# Altium PCB 手工板.PcbDoc
Units mil, origin at the board's own origin, x right, y up, seen from the top; angles counter-clockwise.
Board outline 6000 x 4000 mil, 2 copper layers (Top Layer, Bottom Layer); 49 components, 25 nets, 90 pads, 0 vias.
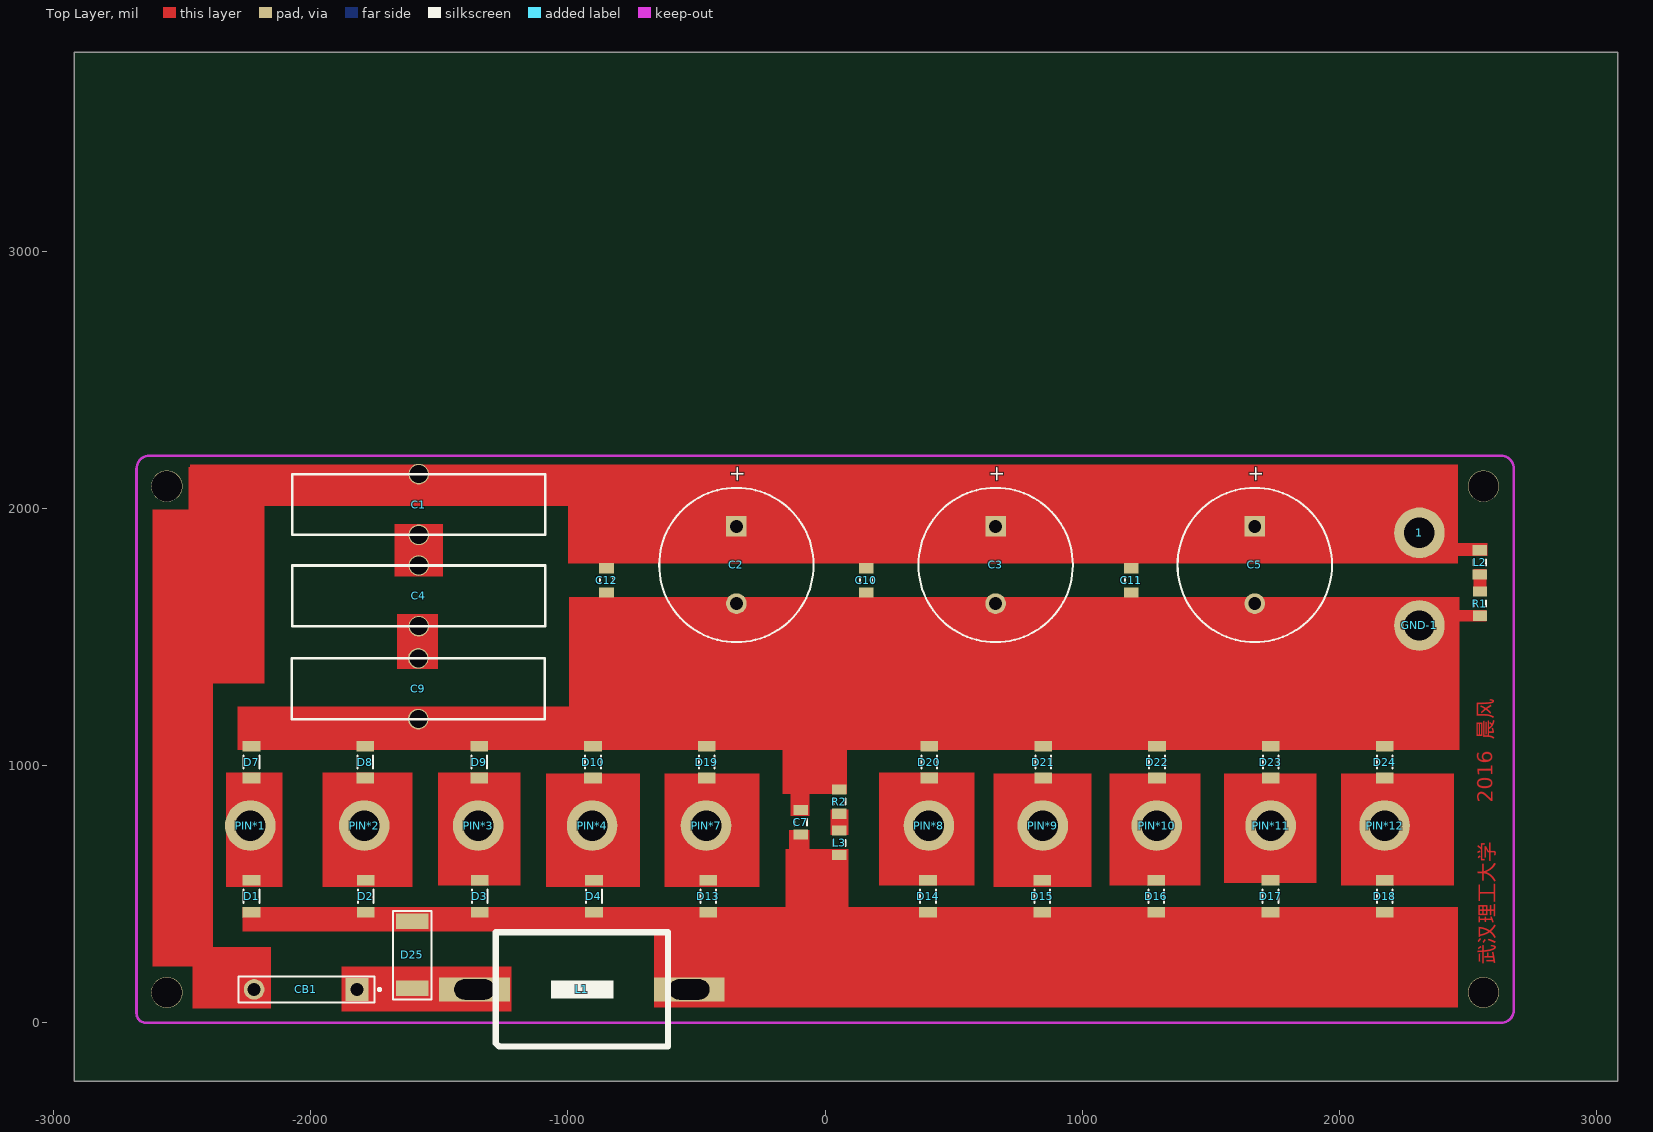
[diagram p0: Top Layer view]
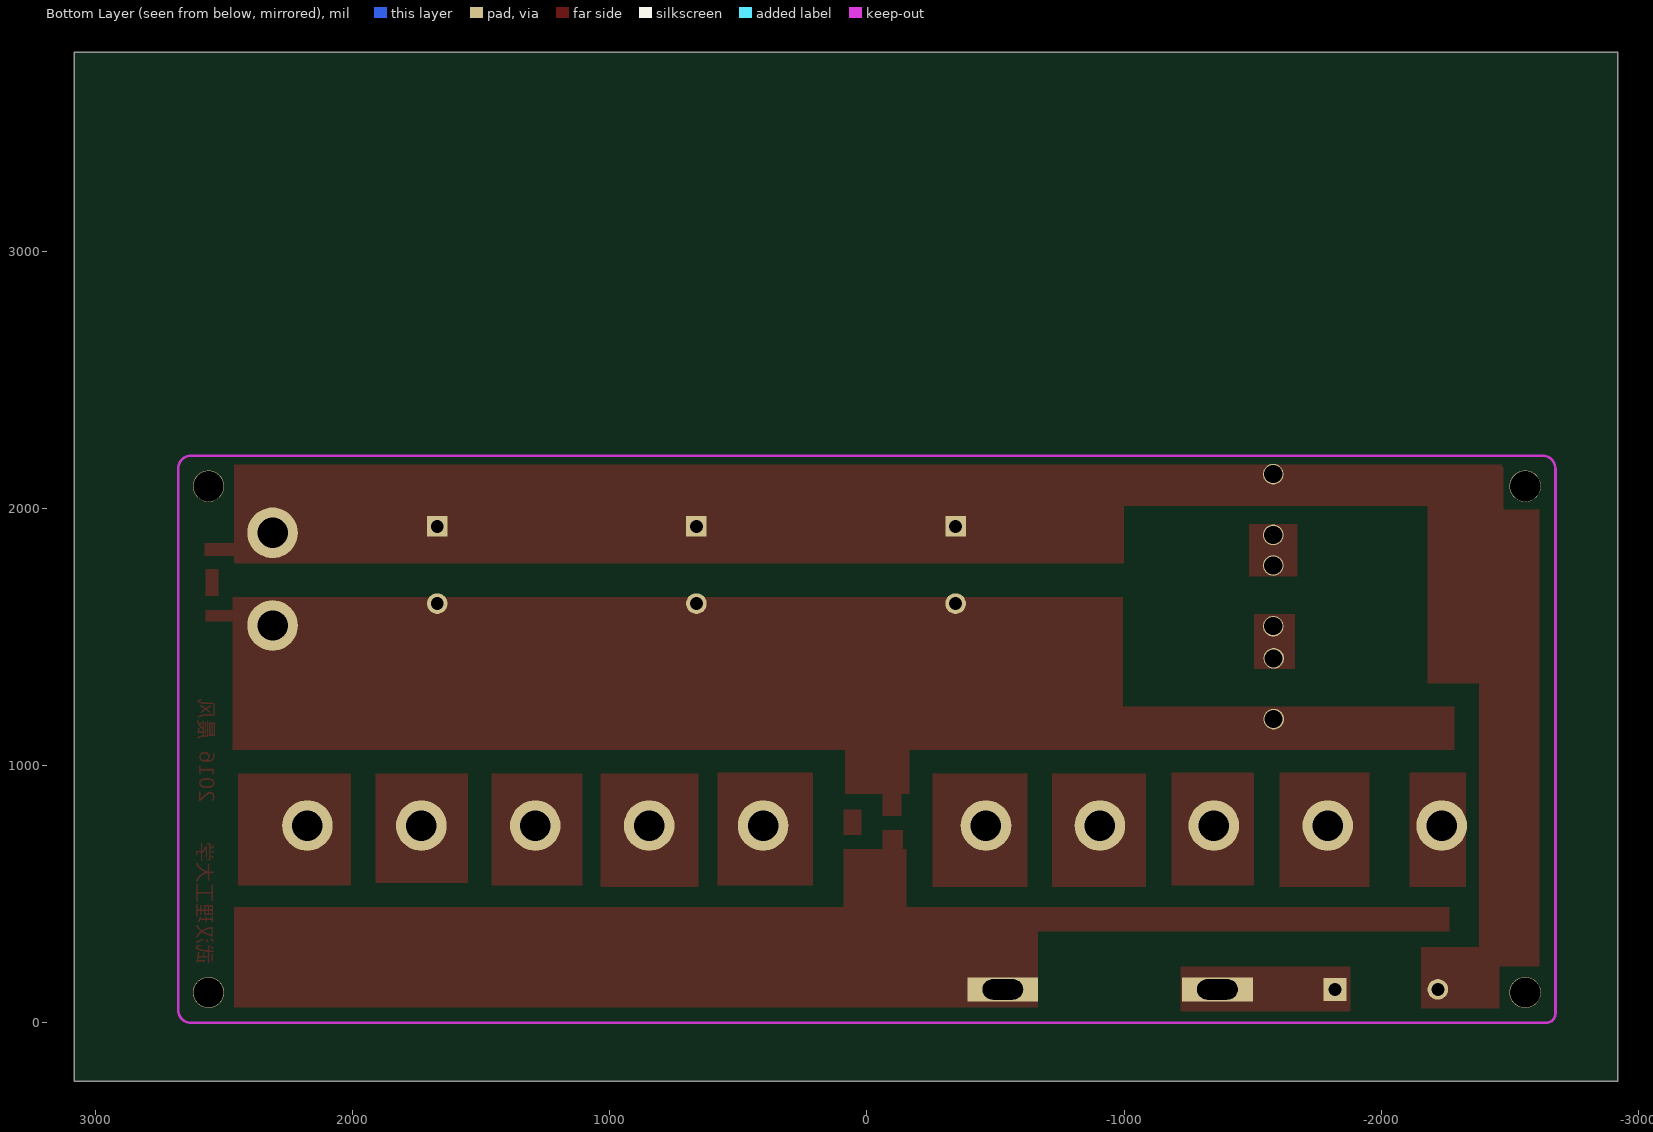
[diagram p1: Bottom Layer view, seen from below]

## Layer stack, top to bottom
Top Layer: signal copper 1.4
Dielectric: dielectric 12.6, FR-4, Dk 4.8
Bottom Layer: signal copper 1.4

## Board outline
-2919.06,-226.89 3080.94,-226.89 3080.94,3773.11 -2919.06,3773.11

## Design rules (kind name [scope] priority, off if disabled: settings)
Clearance [All] p1: gap=25
PolygonConnect [All] p1: connectstyle=Relief reliefconductorwidth=10 reliefentries=4 polygonreliefangle="90 Angle" airgapwidth=10
RoutingVias [All] p1: holewidth=28 width=50 viastyle="Through Hole" minholewidth=28 minwidth=50 maxholewidth=28 maxwidth=50
SolderMaskExpansion [All] p1: expansion=4
Width [All] p1: maxlimit=10 minlimit=10 preferedwidth=10
28 further rules are at their usual default settings.

## Components (designator, comment, footprint, x,y, rotation, side; value= is the part's Value field where it differs from the comment)
1 "PIN" PIN#1 2310,1905 r90 top
C1 "Cap Pol1" 法拉电容 -1580,2015 r270 top
C2 "Cap Pol1" RB7.6-15 -345,1780 r90 top
C3 "Cap Pol1" RB7.6-15 662.5,1780 r90 top
C4 "Cap Pol1" 法拉电容 -1580,1660 r270 top
C5 "Cap Pol1" RB7.6-15 1670,1780 r90 top
C7 "Cap Pol1" C2012 -95,780 r90 top
C9 "Cap Pol1" 法拉电容 -1581.89,1299.06 r270 top
C10 "Cap" C2012 160,1720 r90 top
C11 "Cap" C2012 1190,1720 r90 top
C12 "Cap" C2012 -850,1720 r90 top
CB1 "Circuit Breaker" SPST-2 -1920,130 r180 top
D1 "S4" 1206(2) -2230,491.89 r270 top
D2 "S4" 1206(2) -1786.25,491.89 r270 top
D3 "S4" 1206(2) -1342.5,491.89 r270 top
D4 "S4" 1206(2) -898.75,491.89 r270 top
D7 "S4" 1206(2) -2230,1013.78 r270 top
D8 "S4" 1206(2) -1787.5,1013.78 r270 top
D9 "S4" 1206(2) -1345,1013.78 r270 top
D10 "S4" 1206(2) -902.5,1013.78 r270 top
D13 "S4" 1206(2) -455,491.89 r270 top
D14 "S4" 1206(2) 400,491.89 r270 top
D15 "S4" 1206(2) 843.75,491.89 r270 top
D16 "S4" 1206(2) 1287.5,491.89 r270 top
D17 "S4" 1206(2) 1731.25,491.89 r270 top
D18 "S4" 1206(2) 2175,491.89 r270 top
D19 "S4" 1206(2) -460,1013.78 r270 top
D20 "S4" 1206(2) 405,1013.78 r270 top
D21 "S4" 1206(2) 847.5,1013.78 r270 top
D22 "S4" 1206(2) 1290,1013.78 r270 top
D23 "S4" 1206(2) 1732.5,1013.78 r270 top
D24 "S4" 1206(2) 2175,1013.78 r270 top
D25 "Diode 1N4001" SK54 -1605,265 r90 top
GND-1 "PIN" PIN#1 2310,1545 r0 top
L1 "33uH" SMD-EC-F16 -685,130 r180 top
L2 "LED" C2012 2545,1790 r270 top
L3 "LED" C2012 55,700 r90 top
PIN*1 "PIN" PIN#2 -2189.06,766.89 r0 top
PIN*2 "PIN" PIN#1 -1791.81,766.89 r0 top
PIN*3 "PIN" PIN#1 -1348.9,766.89 r0 top
PIN*4 "PIN" PIN#1 -905.98,766.89 r0 top
PIN*7 "PIN" PIN#3 -429.06,766.89 r0 top
PIN*8 "PIN" PIN#4 420.94,766.89 r0 top
PIN*9 "PIN" PIN#1 845.98,766.89 r0 top
PIN*10 "PIN" PIN#1 1288.9,766.89 r0 top
PIN*11 "PIN" PIN#1 1731.81,766.89 r0 top
PIN*12 "PIN" PIN#5 2180.94,766.89 r0 top
R1 "Res" R2012 2545,1630 r270 top
R2 "Res" R2012 55,860 r90 top

## Footprints (in the part's own frame and the unit in brackets; to place one, negate y for a bottom-side part, rotate by r counter-clockwise, add the part's x,y. Pads: shape width x height; smd on the part's side, far side on the other; paste and mask are expansions set on the pad)
1206(2) [mm]
  rect 1.05x1.75 smd: 1(-1.575,0) 2(1.575,0)
  silkscreen extent -0.65,-0.77 0.65,0.77, body extent -1.6,-0.8 1.6,0.8, height 1.6
C2012 [mm] "Chip Capacitor, 2-Leads, Body 2.0x1.2mm, IPC Low Density"
  rect 1x1.45 smd: 1(-1.2,0) 2(1.2,0)
  silkscreen extent -0.3,-0.63 0.3,0.63, body extent -0.98,-0.6 1.02,0.6, height 0.5
PIN#1 [mm]
  round 5 hole 3: 1(0,0)
PIN#2 [mm]
  round 5 hole 3: 1(-1.16,0)
PIN#3 [mm]
  round 5 hole 3: 1(-0.864,0)
PIN#4 [mm]
  round 5 hole 3: 1(-0.454,0)
PIN#5 [mm]
  round 5 hole 3: 1(-0.158,0)
R2012 [mm] "Chip Resistor, 2-Leads, Body 2.0x1.2mm, IPC Low Density"
  rect 1x1.4 smd: 1(-1.2,0) 2(1.2,0)
  silkscreen extent -0.3,-0.6 0.3,0.6, body extent -0.98,-0.6 1.02,0.6, height 0.5
RB7.6-15 [mil] "Polarized Capacitor (Radial); 2 Leads"
  rect 80x80 hole 50: 1(150,0)
  round 80 hole 50: 2(-150,0)
  silkscreen extent -300,-300 300,300
SK54 [mm]
  rect 1.52x3.18 smd: 1(-3.305,0) 2(3.305,0)
  silkscreen extent -4.44,-1.91 4.32,1.91
SMD-EC-F16 [mm]
  rect 7x2.4 hole 2 slot 4 at 0 deg: 1(-3.973,0) 2(17.215,0)
  silkscreen extent -1.88,-5.64 15.12,5.64
SPST-2 [mil] "Switch; 2 Leads"
  rect 90x90 hole 50: 1(-100,0)
  round 80 hole 50: 2(300,0)
  silkscreen extent -192,-50 360,50
法拉电容 [mil]
  round 80 hole 70: 1(-118.11,0) 2(118.11,0)
  silkscreen extent -118,-492 118,492

## Part data
C1 C2 C3 C4 C5 C7 C9: "Polarized Capacitor (Radial)"
C10 C11 C12: "Capacitor"
D1 D2 D3 D4 D7 D8 D9 D10 D13 D14 D15 D16 D17 D18 D19 D20 D21 D22 D23 D24: library part "Diode 1N4148", "High Conductance Fast Diode"
D25: "1 Amp General Purpose Rectifier"
L1: library part Inductor, "Inductor"
R1 R2: "贴片电阻"

## Free pads (board coordinates)
  round 122.05 hole 118.11: 0(-2559.06,2086.61) 1(2559.06,2086.61) 2(2559.06,118.11) 3(-2559.06,118.11)

## Nets (pads, with @x,y where several pads share a name; then routed paths per layer and width w, separated by ;. In a path a pad name is that pad's centre, name@x,y a point inside that pad or via, vN(x,y) a via of type N, cw(c..) or ccw(c..) an arc to the next point about the centre after c; other vN are vias at no path point)
12V: 1.1 C1.1 C2.1 C3.1 C5.1 C10.2 C11.2 C12.2 CB1.2 L2.1
AC~1: 
AC~2: 
GND: C2.2 C3.2 C5.2 C7.2 C9.2 C10.1 C11.1 C12.1 D7.1 D8.1 D9.1 D10.1 D19.1 D20.1 D21.1 D22.1 D23.1 D24.1 GND-1.1 R1.2 R2.2
NetC1_2: C1.2 C4.1
NetC4_2: C4.2 C9.1
NetC7_1: 
NetC8_1: CB1.1 D25.1 L1.2
NetD1_1: D1.1 D7.2 PIN*1.1
NetD2_1: D2.1 D8.2 PIN*2.1
NetD3_1: D3.1 D9.2 PIN*3.1
NetD4_1: D4.1 D10.2 PIN*4.1
NetD13_1: D13.1 D19.2 PIN*7.1
NetD14_1: D14.1 D20.2 PIN*8.1
NetD15_1: D15.1 D21.2 PIN*9.1
NetD16_1: D16.1 D22.2 PIN*10.1
NetD17_1: D17.1 D23.2 PIN*11.1
NetD18_1: D18.1 D24.2 PIN*12.1
NetL2_2: L2.2 R1.1
NetL3_2: L3.2 R2.1
NetQ1_1: 
NetQ2_1: 
NetQ3_1: 
NetQ4_1: 
VCC: C7.1 D1.2 D2.2 D3.2 D4.2 D13.2 D14.2 D15.2 D16.2 D17.2 D18.2 D25.2 L1.1 L3.1

## Keep-outs
Keep-Out Layer:
  lines w10: -2677.17,36.89 ccw(c-2640.28,36.89) -2640.28,0 -2559.06,0 2559.06,0 2627.17,0 ccw(c2627.17,50) 2677.17,50 2677.17,66.89 2677.17,2154.72 ccw(c2627.17,2154.72) 2627.17,2204.72 -2559.06,2204.72 -2627.17,2204.72 ccw(c-2627.17,2154.72) -2677.17,2154.72 -2677.17,2127.56 -2677.17,36.89

## Other copper
Top Layer:
  region net NetD18_1: 2445,968.78 2005,968.78 2005,533.78 2445,533.78
  region net NetD17_1: 1910,968.78 1550,968.78 1550,543.78 1910,543.78
  region net NetD16_1: 1460,968.78 1105,968.78 1105,533.78 1460,533.78
  region net NetD15_1: 1035,968.78 655,968.78 655,528.78 1035,528.78
  region net NetD14_1: 580,973.78 210,973.78 210,533.78 580,533.78
  region net NetD13_1: -255,968.78 -625,968.78 -625,528.78 -255,528.78
  region net NetD4_1: -720,968.78 -1085,968.78 -1085,528.78 -720,528.78
  region net NetD3_1: -1185,973.78 -1505,973.78 -1505,533.78 -1185,533.78
  region net NetD2_1: -1605,973.78 -1955,973.78 -1955,528.78 -1605,528.78
  region net NetD1_1: -2110,973.78 -2330,973.78 -2330,528.78 -2110,528.78
  rectangle net VCC: -2265,355 2460,450
  rectangle net VCC: -665,60 2460,385
  rectangle net NetC8_1: -1880,45 -1220,220
  rectangle net 12V: -2460,55 -2155,295
  rectangle net 12V: -2615,220 -2380,1995
  rectangle net 12V: -2470,2010 -905,2170
  rectangle net 12V: -2475,1320 -2180,2160
  rectangle net 12V: -1000,1785 2460,2170
  rectangle net NetC1_2: -1675,1735 -1485,1940
  rectangle net NetC4_2: -1665,1375 -1505,1590
  rectangle net GND: -2285,1060 2465,1230
  rectangle net GND: -995,1220 2465,1655
  rectangle net NetL2_2: 2520,1660 2570,1765
  rectangle net 12V: 2450,1815 2575,1865
  rectangle net GND: 2435,1560 2570,1605
  rectangle net NetL3_2: 20,730 90,830
  rectangle net GND: -165,890 85,1080
  rectangle net GND: -135,805 -60,920
  rectangle net VCC: -155,430 90,675
  rectangle net VCC: -140,670 -60,750
  text "晨风" at 2615,1100 h100 r90
  text "2016" at 2615,855 h100 r90.25
  text "武汉理工大学" at 2620,225 h100 r90

## Text inside footprints (layer, text, board x,y; h text height)
C2: Top Overlay "+" at -315.99,2100.15 h59.06 r90
C3: Top Overlay "+" at 691.51,2100.15 h59.06 r90
C5: Top Overlay "+" at 1699.01,2100.15 h59.06 r90